# EAGLE board cell (EAGLE 7.1.0)
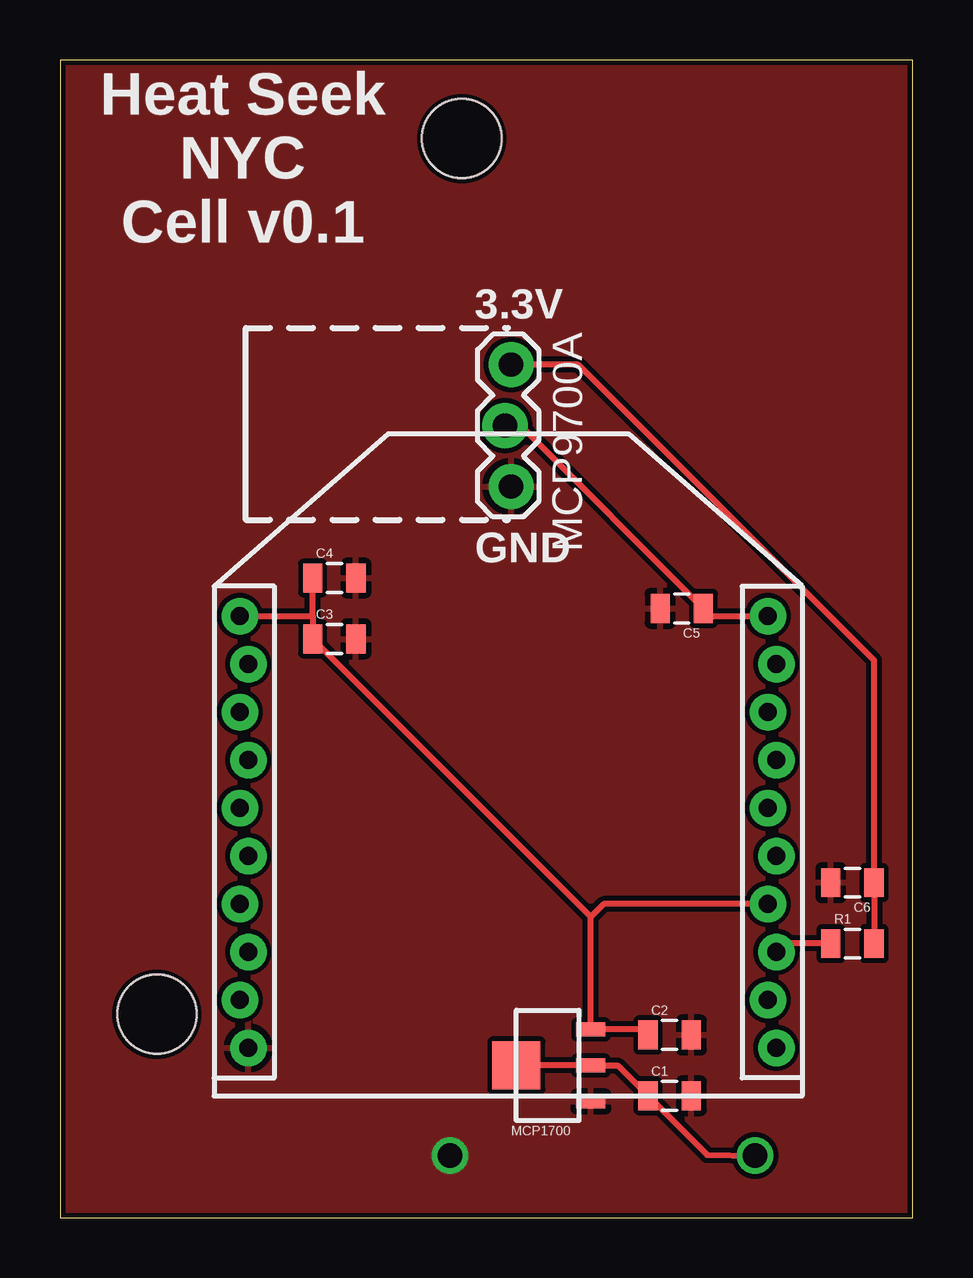
[diagram p0: board, top side]
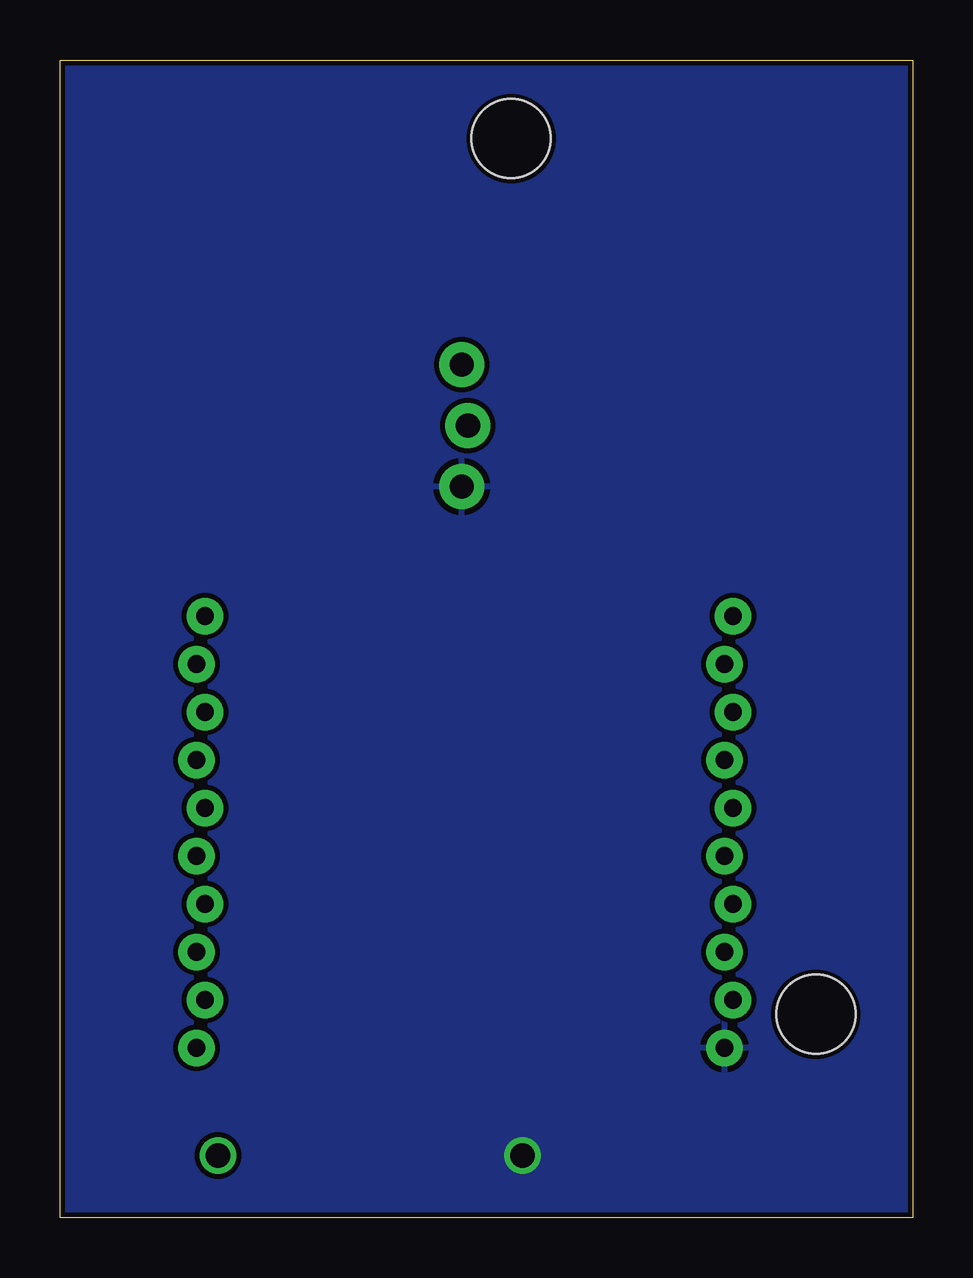
[diagram p1: board, bottom side, seen from below]

Size 35.53 x 48.26 mm. Coordinates in mm from the lower left corner, seen from the top.
Outline: 0,0 35.53,0 35.53,48.26 0,48.26 0,0
Copper layers (1*16): Top 0.035mm / dielectric 1.5mm / Bottom 0.035mm
Design rules "SparkFun-2-layer": minimum track width 7mil, minimum drill 15mil, track to track 8mil, track to pad 8mil, pad to pad 8mil, via to via 8mil, smd to smd 8mil, copper to edge 8mil, drill to drill 8mil, minimum pad ring 12mil, minimum via ring 10mil, stop-mask expansion 4mil, vias tented up to drill 20mil, thermal gap 10mil
Holes 3.3 mm at 4.04,8.48 16.74,44.98

## Footprints (pad centres in the part's own frame; a part is rotated, then mirrored left to right if it is on the bottom)
0805 = smd 0.8 x 1.2: 1 -0.9,0; 2 0.9,0
SOT-89-3 = smd 0.58 x 1.2: 1 -1.5,-1.8; 2 0,-1.8; 3 1.5,-1.8 | smd 2 x 2: 4 0,1.3
1X03_LOCK = drill 1.016 pad 1.88: 1 0,0.127; 2 2.54,-0.127; 3 5.08,0.127
XBEE-1_LOCK = drill 0.737 pad 1.524: 1 -11.178,20; 2 -10.822,18; 3 -11.178,16; 4 -10.822,14; 5 -11.178,12; 6 -10.822,10; 7 -11.178,8; 8 -10.822,6; 9 -11.178,4; 10 -10.822,2; 11 11.178,2; 12 10.822,4; 13 11.178,6; 14 10.822,8; 15 11.178,10; 16 10.822,12; 17 11.178,14; 18 10.822,16; 19 11.178,18; 20 10.822,20

## Placement (x,y rotation side)
C1  1µF  [0805]  25.4,5.08 0 top
C2  1µF  [0805]  25.4,7.62 0 top
C3  1µF  [0805]  11.43,24.13 0 top
C4  8.2pF  [0805]  11.43,26.67 0 top
C5  0.1µF  [0805]  25.91,25.4 180 top
C6  1µF  [0805]  33.02,13.97 180 top
FRAME1  FRAME-LETTER  [CREATIVE_COMMONS]  0,60 0 top  (outside the outline)
MCP1700  MCP1700  [SOT-89-3]  20.32,6.35 90 top
MCP9700A  [1X03_LOCK]  18.67,35.56 270 top
R1  200Ω  [0805]  33.02,11.43 0 top
XB24  XBEE-1XBEE-1_LOCK  [XBEE-1_LOCK]  18.67,5.08 0 top

## Library data of the parts
C1-C6 = SparkFun-Capacitors
FRAME1 = SparkFun-Aesthetics
MCP1700 XB24 = hrldcpr
MCP9700A = SparkFun-Connectors
R1 = SparkFun-Resistors

## Nets
3.3V: C2.1 C3.1 C4.1 MCP1700.3 XB24.1 XB24.14
GND: C1.2 C2.2 C3.2 C4.2 C5.2 C6.2 MCP1700.1 MCP9700A.3 XB24.10
N$1: C6.1 MCP9700A.1 R1.2
N$2: R1.1 XB24.13
N$3: C5.1 MCP9700A.2 XB24.20
V_BATT: C1.1 MCP1700.2

## Tracks (layer width: path | path; a pad name or v marks a point on that pad's centre or on a via)
3.3V
  Top 0.254: XB24.1 10.53,25.08 | 10.53,25.08 C4.1 | 10.53,25.08 C3.1 22.12,12.54 | 24.5,8.09 24.5,7.85 | 24.5,7.85 C2.1 | 24.5,7.85 MCP1700.3 22.12,12.54 | XB24.14 22.66,13.08 22.12,12.54
GND  (via drill 1.02)
  other vias: 16.26,2.59
  pour Bottom: 0,0 0,48.26 35.53,48.26 35.53,0
  pour Top: 0,0 0,48.26 35.53,48.26 35.53,0
N$1
  Top 0.254: R1.2 C6.1 33.92,23.23 21.59,35.56 MCP9700A.1
N$2
  Top 0.254: R1.1 30.2,11.43 XB24.13
N$3
  Top 0.254: XB24.20 26.81,25.08 C5.1 19.19,33.02 MCP9700A.2
N$4
  Top 0.254: 21.59,6.35 19.05,6.35
V_BATT  (via drill 1.02)
  Top 0.254: MCP1700.2 23.23,6.35 C1.1 26.96,2.62 v28.96,2.59

## Text on the board
tPlace: Heat Seek / NYC / Cell v0.1 | 3.3V | GND
tDocu: Harold Cooper